# Altium PCB bootleg-ev.PcbDoc
Units mil, origin at the board's own origin, x right, y up, seen from the top; angles counter-clockwise.
Board outline 11212.63 x 3712.63 mil, 2 copper layers (Component Side, Bottom Layer), stack 61.855 mil thick; 169 components, 134 nets, 752 pads, 117 vias.
Unrouted connection lines stored in the file: 280.
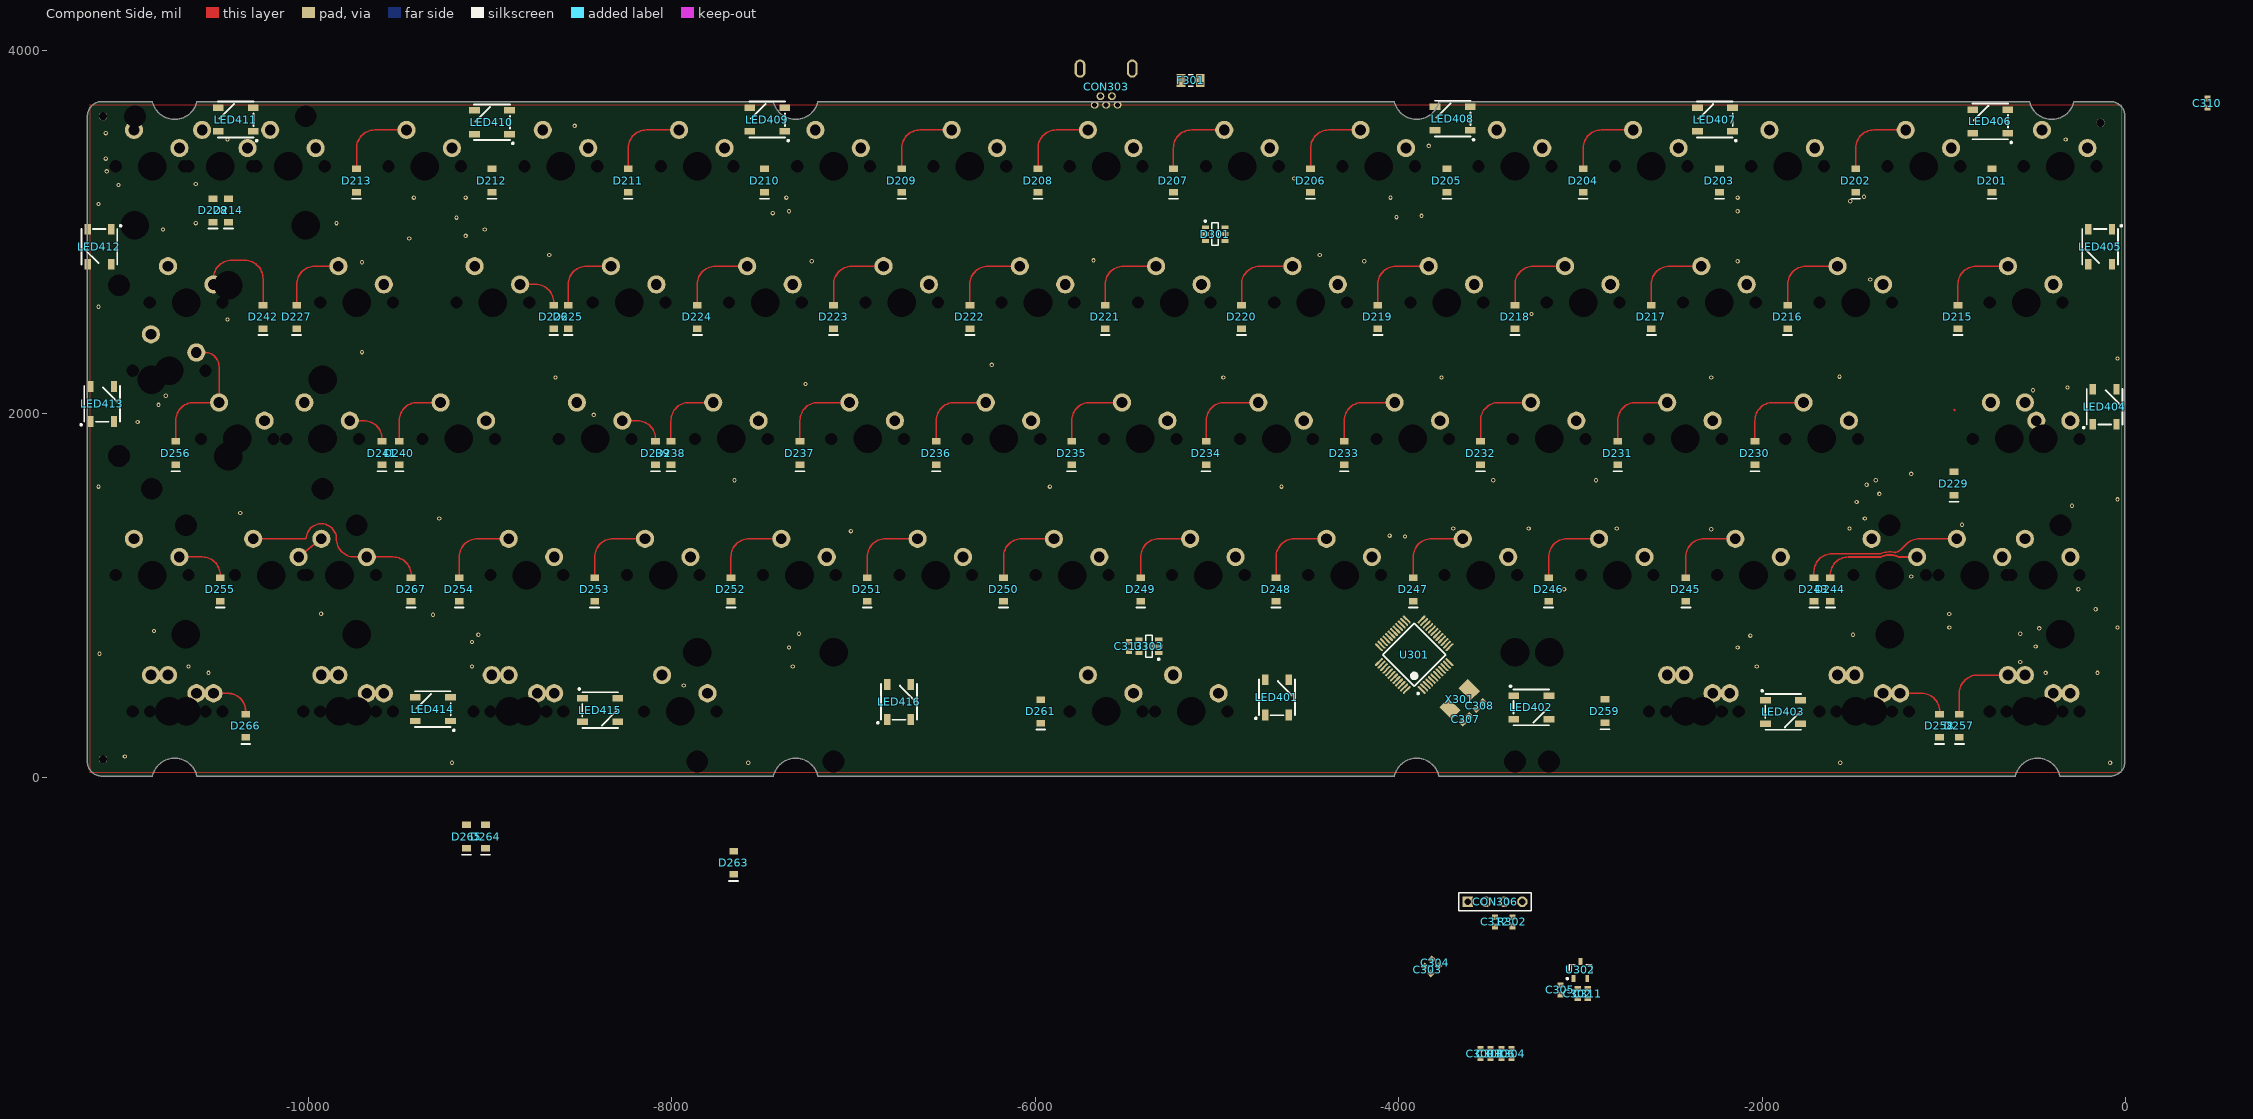
[diagram p0: Component Side view]
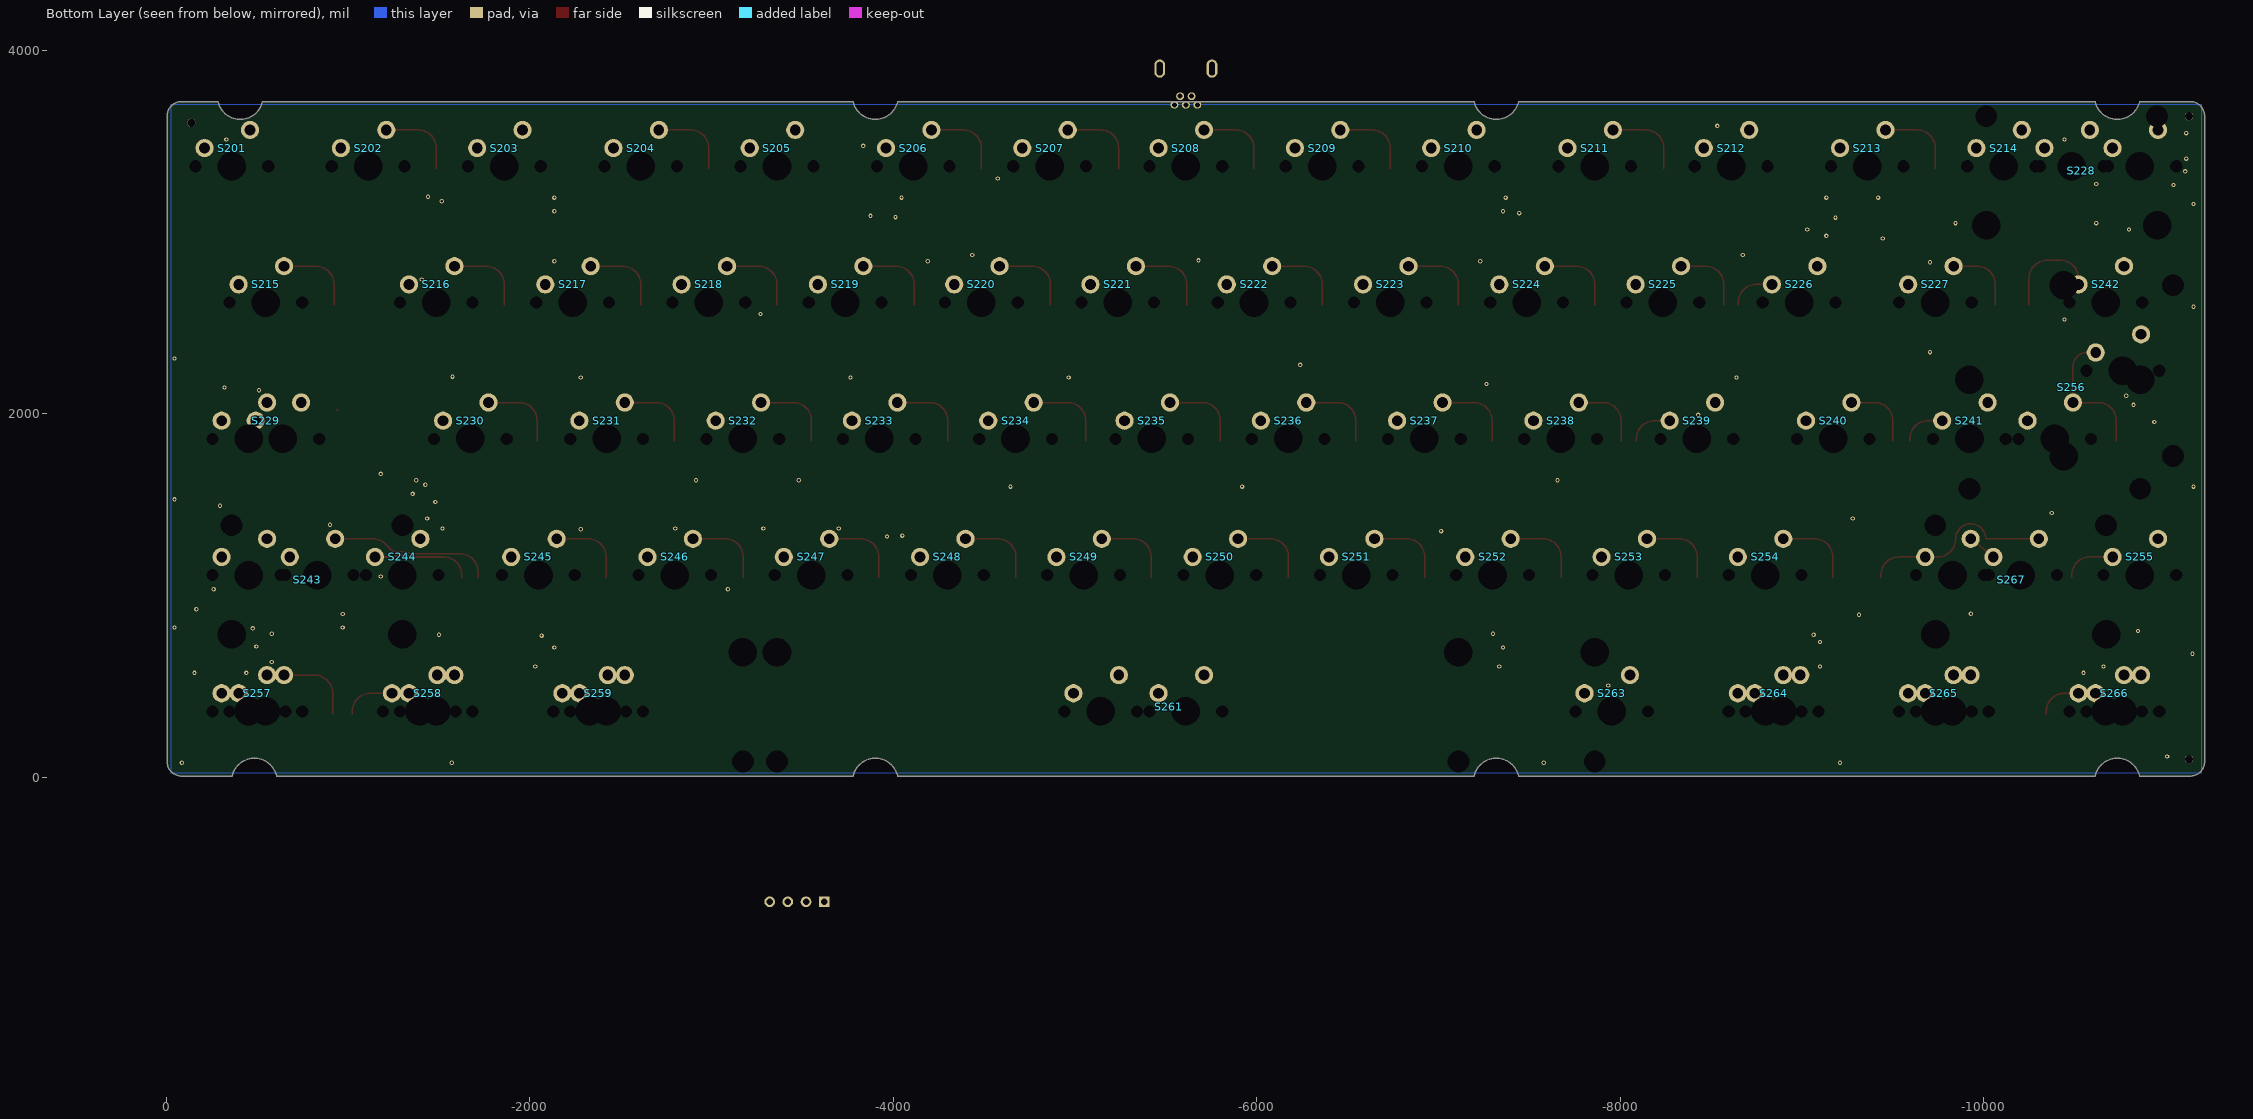
[diagram p1: Bottom Layer view, seen from below]

## Layer stack, top to bottom
Top Solder: solder mask 0.4, Solder Resist, Dk 3.5
Component Side: signal copper 1.4
Dielectric 1: core 59.0551, FR-4, Dk 4.2
Bottom Layer: signal copper 1.4
Solder Side: solder mask 0.4, Solder Resist, Dk 3.5

## Board outline
-11135.83,6.48 -10860.24,6.48 ccw(c-10860.24,8.46) -10858.3,8.03 cw(c-10736.22,-20.45) -10614.14,8.01 ccw(c-10612.21,8.46) -10612.21,6.48 -7442.91,6.48 ccw(c-7442.91,8.46) -7440.98,8.01 cw(c-7318.9,-20.45) -7196.82,8.03 cw(c-7318.9,-20.45) -7196.81,8.01 -7196.82,8.03 ccw(c-7194.88,8.46) -7194.88,6.48 -4025.59,6.48 ccw(c-4025.59,8.46) -4023.65,8.04 cw(c-3901.58,-20.45) -3779.5,8.03 ccw(c-3777.56,8.46) -3777.56,6.48 -608.27,6.48 ccw(c-608.27,8.46) -606.33,8.03 cw(c-484.25,-20.45) -362.17,8.01 ccw(c-360.24,8.46) -360.24,6.48 ccw(c-360.24,8.46) -360.24,6.48 -84.65,6.48 ccw(c-84.65,87.2) -3.92,87.2 -3.92,1537.95 ccw(c-5.91,1537.99) -3.92,1537.99 -3.92,3638.39 ccw(c-84.65,3638.39) -84.65,3719.11 -281.5,3719.11 ccw(c-281.5,3717.13) -282.03,3719.04 ccw(c-282.56,3717.13) -284.49,3717.58 cw(c-406.58,3746.04) -528.65,3717.56 ccw(c-530.59,3717.13) -530.59,3719.11 -3777.56,3719.11 cw(c-3777.56,3717.13) -3777.56,3719.11 ccw(c-3777.56,3717.13) -3779.49,3717.58 cw(c-3901.58,3746.04) -4023.65,3717.56 ccw(c-4025.59,3717.13) -4025.59,3719.11 -7194.88,3719.11 ccw(c-7194.88,3717.13) -7196.82,3717.56 ccw(c-7318.9,3746.04) -7196.81,3717.58 -7196.82,3717.56 cw(c-7318.9,3746.04) -7440.98,3717.58 ccw(c-7442.91,3717.13) -7442.91,3719.11 -10612.2,3719.11 ccw(c-10612.2,3717.12) -10614.13,3717.57 cw(c-10736.22,3746.04) -10858.31,3717.56 ccw(c-10860.25,3717.13) -10860.25,3719.11 -11135.83,3719.11 cw(c-11135.83,3717.13) -11135.81,3719.11 -11135.83,3719.11 ccw(c-11135.83,3638.39) -11216.55,3638.39 ccw(c-11214.57,3638.39) -11216.55,3638.37 -11216.55,1537.99 -11216.55,1605 cw(c-11214.57,1605) -11216.55,1605.03 -11216.55,1605 -11216.55,87.2 ccw(c-11135.83,87.2)

## Design rules (kind name [scope] priority, off if disabled: settings)
Clearance [All] p1: gap=7.87 ignorepadtopadclearanceinfootprint=FALSE except(0: Arc-Hole Track-Hole SMDPad-Hole THPad-Hole Via-Hole Fill-Hole Poly-Hole Region-Hole Text-Hole; 10: THPad-THPad THPad-Via THPad-Fill THPad-Poly THPad-Region THPad-Text Via-Via Via-Fill Via-Poly Via-Region Via-Text Fill-Fill Fill-Poly Fill-Region Fill-Text Poly-Poly Poly-Region Poly-Text Region-Region Region-Text Text-Text)
ComponentClearance [InComponent('No Component') And OnLayer('Component Side')] p1: gap=10 collisioncheckmode=3 verticalgap=10 showdistances=FALSE
DiffPairsRouting DiffPairsRouting_USB [InDifferentialPairClass('All Differential Pairs')] p1: maxlimit=10 minlimit=8 mostfreqgap=8 toplayer_minwidth=6 toplayer_maxwidth=15 toplayer_prefwidth=6 bottomlayer_minwidth=6 bottomlayer_maxwidth=15 bottomlayer_prefwidth=6 maxuncoupledlength=500
DiffPairsRouting [All] p2: maxlimit=10 minlimit=10 mostfreqgap=10 toplayer_minwidth=15 toplayer_maxwidth=15 toplayer_prefwidth=15 bottomlayer_minwidth=15 bottomlayer_maxwidth=15 bottomlayer_prefwidth=15 maxuncoupledlength=500
HoleSize [All] p1: absolutevalues=TRUE maxlimit=787.4 minlimit=1 maxpercent=80.000 minpercent=20.000
MatchedLengths MatchedLengths_USB_DiffPairs_1 [All] p1: tolerance=5 checknetsindiffpair=TRUE checkdiffpairvsdiffpair=FALSE checkxsignals=FALSE checkothers=FALSE
MatchedLengths MatchedLengths_USB_DiffPairs [All] p2: tolerance=5 checknetsindiffpair=TRUE checkdiffpairvsdiffpair=FALSE checkxsignals=FALSE checkothers=FALSE
PolygonConnect PolygonConnect_1 [All vs IsVia] p1: connectstyle=Direct reliefconductorwidth=10 reliefentries=4 polygonreliefangle="90 Angle" airgapwidth=10
PolygonConnect [All] p2: connectstyle=Relief reliefconductorwidth=10 reliefentries=4 polygonreliefangle="90 Angle" airgapwidth=10
RoutingVias [All] p1: holewidth=28 width=50 viastyle="Through Hole" minholewidth=11.81 minwidth=23.62 maxholewidth=28 maxwidth=50
SolderMaskExpansion [All] p1: expansion=4 istentingtop=FALSE
Width [All] p1: maxlimit=196.85 minlimit=8 preferedwidth=8 minimp=50.000000 maximp=50.000000 favimp=50.000000
27 further rules are at their usual default settings.

## Classes and differential pairs
component class Designator: C201 C202 C203 C204 C205 C206 D201 D202 D203 D204 D205 D206 D207 D208 D209 D210 D211 D212 D213 D214 D215 D216 D217 D218 D219 D220 D221 D222 D223 D224 D225 D226 D227 D228 D229 D230 D231 D232 D233 D234 D235 D236 D237 D238 D239 D240 D241 D242 D243 D244 D245 D246 D247 D248 D249 D250 D251 D252 D253 D254 D255 D256 D257 D258 D259 D261 D263 D264 D265 D266 D267 S201 S202 S203 S204 S205 S206 S207 S208 S209 S210 S211 S212 S213 S214 S215 S216 S217 S218 S219 S220 S221 S222 S223 S224 S225 S226 S227 S228 S229 S230 S231 S232 S233 S234 S235 S236 S237 S238 S239 S240 S241 S242 S243 S244 S245 S246 S247 S248 S249 S250 S251 S252 S253 S254 S255 S256 S257 S258 S259 S261 S263 S264 S265 S266 S267
differential pair D: +D_P -D_N

## Components (designator, comment, footprint, x,y, rotation, side; value= is the part's Value field where it differs from the comment)
C301 "" C0603[1608] -3495,-1520 r90 top value=0.1uF
C302 "" C0603[1608] -3015,-1190 r90 top value=0.1uF
C303 "" C0603[1608] -3840,-1060 r315 top value=0.1uF
C304 "" C0603[1608] -3800,-1020 r315 top value=0.1uF
C305 "" C0603[1608] -3110,-1170 r270 top value=0.1uF
C306 "" C0603[1608] -3435,-1520 r90 top value=0.1uF
C307 "" C0603[1608] -3630,320 r225 top value=30pF
C308 "" C0603[1608] -3555,395 r45 top value=30pF
C309 "" C0603[1608] -3550,-1520 r270 top value=0.1uF
C310 "" C0603[1608] 450,3710 r90 top value=4,7uF
C311 "" C0603[1608] -2960,-1190 r90 top value=1uF
C312 "" C0603[1608] -3470,-795 r270 top value=4,7uF
C313 "" C0603[1608] -5485,721.06 r270 top value=0.1uF
CON303 "TE 2172034-1" "TE 2172034-1" -5610.24,3900 r90 top
CON306 "Header 4" HDR1X4 -3320,-685 r180 top
D201 "Diode" SOD-123 -735,3284.06 r90 top
D202 "Diode" SOD-123 -1485,3284.06 r90 top
D203 "Diode" SOD-123 -2235,3284.06 r90 top
D204 "Diode" SOD-123 -2985,3284.06 r90 top
D205 "Diode" SOD-123 -3735,3284.06 r90 top
D206 "Diode" SOD-123 -4485,3284.06 r90 top
D207 "Diode" SOD-123 -5240,3284.06 r90 top
D208 "Diode" SOD-123 -5985,3284.06 r90 top
D209 "Diode" SOD-123 -6735,3284.06 r90 top
D210 "Diode" SOD-123 -7490,3284.06 r90 top
D211 "Diode" SOD-123 -8240,3284.06 r90 top
D212 "Diode" SOD-123 -8990,3284.06 r90 top
D213 "Diode" SOD-123 -9735,3284.06 r90 top
D214 "Diode" SOD-123 -10440,3120.08 r90 top
D215 "Diode" SOD-123 -922.5,2534.06 r90 top
D216 "Diode" SOD-123 -1860,2534.06 r90 top
D217 "Diode" SOD-123 -2610,2534.06 r90 top
D218 "Diode" SOD-123 -3360,2534.06 r90 top
D219 "Diode" SOD-123 -4115,2534.06 r90 top
D220 "Diode" SOD-123 -4865,2534.06 r90 top
D221 "Diode" SOD-123 -5615,2534.06 r90 top
D222 "Diode" SOD-123 -6360,2534.06 r90 top
D223 "Diode" SOD-123 -7110,2534.06 r90 top
D224 "Diode" SOD-123 -7860,2534.06 r90 top
D225 "Diode" SOD-123 -8570,2534.06 r90 top
D226 "Diode" SOD-123 -8650,2534.06 r90 top
D227 "Diode" SOD-123 -10065,2534.06 r90 top
D228 "Diode" SOD-123 -10525,3120.08 r90 top
D229 "Diode" SOD-123 -945,1616.42 r90 top
D230 "Diode" SOD-123 -2040,1784.06 r90 top
D231 "Diode" SOD-123 -2795,1784.06 r90 top
D232 "Diode" SOD-123 -3550,1784.06 r90 top
D233 "Diode" SOD-123 -4300,1784.06 r90 top
D234 "Diode" SOD-123 -5060,1784.06 r90 top
D235 "Diode" SOD-123 -5800,1784.06 r90 top
D236 "Diode" SOD-123 -6545,1784.06 r90 top
D237 "Diode" SOD-123 -7295,1784.06 r90 top
D238 "Diode" SOD-123 -8005,1784.06 r90 top
D239 "Diode" SOD-123 -8090,1784.06 r90 top
D240 "Diode" SOD-123 -9500,1784.06 r90 top
D241 "Diode" SOD-123 -9595,1784.06 r90 top
D242 "Diode" SOD-123 -10250,2534.06 r90 top
D243 "Diode" SOD-123 -1715,1034.06 r90 top
D244 "Diode" SOD-123 -1625,1034.06 r90 top
D245 "Diode" SOD-123 -2420,1034.06 r90 top
D246 "Diode" SOD-123 -3175,1034.06 r90 top
D247 "Diode" SOD-123 -3920,1034.06 r90 top
D248 "Diode" SOD-123 -4675,1034.06 r90 top
D249 "Diode" SOD-123 -5420,1034.06 r90 top
D250 "Diode" SOD-123 -6175,1034.06 r90 top
D251 "Diode" SOD-123 -6925,1034.06 r90 top
D252 "Diode" SOD-123 -7675,1034.06 r90 top
D253 "Diode" SOD-123 -8425,1034.06 r90 top
D254 "Diode" SOD-123 -9170,1034.06 r90 top
D255 "Diode" SOD-123 -10485,1034.06 r90 top
D256 "Diode" SOD-123 -10730,1784.06 r90 top
D257 "Diode" SOD-123 -915,284.06 r90 top
D258 "Diode" SOD-123 -1023.62,284.06 r90 top
D259 "Diode" SOD-123 -2865,364.37 r90 top
D261 "Diode" SOD-123 -5970,362.8 r90 top
D263 "Diode" SOD-123 -7660,-470 r90 top
D264 "Diode" SOD-123 -9025,-325.94 r90 top
D265 "Diode" SOD-123 -9130.08,-325.94 r90 top
D266 "Diode" SOD-123 -10345,284.06 r90 top
D267 "Diode" SOD-123 -9435,1034.06 r90 top
D301 "SRV05" SOT-23-6 -5010,2990 r0 top
F301 "Fuse Thermal" C1206[3216] -5145,3835 r180 top
LED401 "WS2812B" WS2812B -4670,440 r90 top
LED402 "WS2812B" WS2812B -3270,385 r0 top
LED403 "WS2812B" WS2812B -1885,360 r0 top
LED404 "WS2812B" WS2812B -115,2040 r90 top
LED405 "WS2812B" WS2812B -140,2920 r270 top
LED406 "WS2812B" WS2812B -745,3610 r180 top
LED407 "WS2812B" WS2812B -2260,3620 r180 top
LED408 "WS2812B" WS2812B -3703.54,3625.04 r180 top
LED409 "WS2812B" WS2812B -7475,3620 r180 top
LED410 "WS2812B" WS2812B -8990,3605 r180 top
LED411 "WS2812B" WS2812B -10400,3620 r180 top
LED412 "WS2812B" WS2812B -11150,2920 r270 top
LED413 "WS2812B" WS2812B -11135,2055 r90 top
LED414 "WS2812B" WS2812B -9315,375 r180 top
LED415 "WS2812B" WS2812B -8395,370 r0 top
LED416 "WS2812B" WS2812B -6750,415 r90 top
R302 "Res1" R0603[1608] -3375,-795 r270 top value=1.5K
R304 "Res1" R0603[1608] -3380,-1520 r90 top value=10K
S201 "MX" "MX-SWITCH - SWITCHED POL" -360.24,3362.8 r180 bottom locked
S202 "MX" "MX-switch - switched pol - connector" -1110.24,3362.8 r180 bottom locked
S203 "MX" "MX-SWITCH - SWITCHED POL" -1860.24,3362.8 r180 bottom locked
S204 "MX" "MX-switch - switched pol" -2610.24,3362.8 r180 bottom locked
S205 "MX" "MX-switch - switched pol" -3360.24,3362.8 r180 bottom locked
S206 "MX" "MX-switch - switched pol" -4110.24,3362.8 r180 bottom locked
S207 "MX" "MX-switch - switched pol" -4860.24,3362.8 r180 bottom locked
S208 "MX" "MX-switch - switched pol" -5610.24,3362.8 r180 bottom locked
S209 "MX" "MX-switch - switched pol" -6360.24,3362.8 r180 bottom locked
S210 "MX" "MX-switch - switched pol" -7110.24,3362.8 r180 bottom locked
S211 "MX" "MX-switch - switched pol" -7860.24,3362.8 r180 bottom locked
S212 "MX" "MX-switch - switched pol" -8610.24,3362.8 r180 bottom locked
S213 "MX" "MX-switch - switched pol" -9360.24,3362.8 r180 bottom locked
S214 "MX" "MX-switch - switched pol" -10110.24,3362.8 r180 bottom locked
S215 "MX" "MX-switch - 1.5U" -547.74,2612.8 r180 bottom locked
S216 "MX" "MX-SWITCH - SWITCHED POL" -1485.24,2612.8 r180 bottom locked
S217 "MX" "MX-SWITCH - SWITCHED POL" -2235.24,2612.8 r180 bottom locked
S218 "MX" "MX-SWITCH - SWITCHED POL" -2985.24,2612.8 r180 bottom locked
S219 "MX" "MX-SWITCH - SWITCHED POL" -3735.24,2612.8 r180 bottom locked
S220 "MX" "MX-SWITCH - SWITCHED POL" -4485.24,2612.8 r180 bottom locked
S221 "MX" "MX-SWITCH - SWITCHED POL" -5235.24,2612.8 r180 bottom locked
S222 "MX" "MX-SWITCH - SWITCHED POL" -5985.24,2612.8 r180 bottom locked
S223 "MX" "MX-SWITCH - SWITCHED POL" -6735.24,2612.8 r180 bottom locked
S224 "MX" "MX-SWITCH - SWITCHED POL" -7485.24,2612.8 r180 bottom locked
S225 "MX" "MX-SWITCH - SWITCHED POL" -8235.24,2612.8 r180 bottom locked
S226 "MX" MX-switch -8985.24,2612.8 r180 bottom locked
S227 "MX" "MX-SWITCH - SWITCHED POL" -9735.24,2612.8 r180 bottom locked
S228 "MX" "MX-switch - backspace" -10485,3362.8 r180 bottom locked
S229 "MX" "MX-switch - CAPS" -641.49,1862.8 r180 bottom locked
S230 "MX" "MX-SWITCH - SWITCHED POL" -1672.74,1862.8 r180 bottom locked
S231 "MX" "MX-SWITCH - SWITCHED POL" -2422.74,1862.8 r180 bottom locked
S232 "MX" "MX-SWITCH - SWITCHED POL" -3172.74,1862.8 r180 bottom locked
S233 "MX" "MX-SWITCH - SWITCHED POL" -3922.74,1862.8 r180 bottom locked
S234 "MX" "MX-SWITCH - SWITCHED POL" -4672.74,1862.8 r180 bottom locked
S235 "MX" "MX-SWITCH - SWITCHED POL" -5422.74,1862.8 r180 bottom locked
S236 "MX" "MX-SWITCH - SWITCHED POL" -6172.74,1862.8 r180 bottom locked
S237 "MX" "MX-SWITCH - SWITCHED POL" -6922.74,1862.8 r180 bottom locked
S238 "MX" "MX-SWITCH - SWITCHED POL" -7672.74,1862.8 r180 bottom locked
S239 "MX" MX-switch -8422.74,1862.8 r180 bottom locked
S240 "MX" "MX-SWITCH - SWITCHED POL" -9172.74,1862.8 r180 bottom locked
S241 "MX" MX-switch -9922.5,1862.8 r180 bottom locked
S242 "MX" "MX-switch - 1.5U" -10672.74,2612.8 r180 bottom locked
S243 "MX" "MX-SWITCH - LEFT SHIFT" -828.99,1112.8 r180 bottom locked
S244 "MX" MX-switch -1297.64,1112.8 r180 bottom locked
S245 "MX" "MX-SWITCH - SWITCHED POL" -2047.73,1112.8 r180 bottom locked
S246 "MX" "MX-SWITCH - SWITCHED POL" -2797.73,1112.8 r180 bottom locked
S247 "MX" "MX-SWITCH - SWITCHED POL" -3547.73,1112.8 r180 bottom locked
S248 "MX" "MX-SWITCH - SWITCHED POL" -4297.73,1112.8 r180 bottom locked
S249 "MX" "MX-SWITCH - SWITCHED POL" -5047.73,1112.8 r180 bottom locked
S250 "MX" "MX-SWITCH - SWITCHED POL" -5797.73,1112.8 r180 bottom locked
S251 "MX" "MX-SWITCH - SWITCHED POL" -6547.73,1112.8 r180 bottom locked
S252 "MX" "MX-SWITCH - SWITCHED POL" -7297.72,1112.8 r180 bottom locked
S253 "MX" "MX-SWITCH - SWITCHED POL" -8047.73,1112.8 r180 bottom locked
S254 "MX" "MX-SWITCH - SWITCHED POL" -8797.73,1112.8 r180 bottom locked
S255 "MX" MX-switch -10860.24,1112.8 r180 bottom locked
S256 "MX" "MX-SWITCH - ENTER" -10391.73,1862.8 r180 bottom locked
S257 "MX" "MX-switch - 1.5u MOD-L" -547.74,362.8 r180 bottom locked
S258 "MX" "MX-switch - 1u MOD-L" -1485,362.8 r180 bottom locked
S259 "MX" "MX-switch - 1.5u MOD-L" -2422.72,362.8 r180 bottom locked
S261 "MX" "MX-switch - Space_V2" -5610.22,362.8 r180 bottom locked
S263 "MX" MX-switch -7953.98,362.8 r180 bottom locked
S264 "MX" "MX-switch - 1.5u MOD-R" -8797.72,362.8 r180 bottom locked
S265 "MX" "MX-switch - 1u MOD-R" -9735,362.8 r180 bottom locked
S266 "MX" "MX-switch - 1.5u MOD-R" -10672.72,362.8 r180 bottom locked
S267 "MX" "MX-SWITCH - RIGHT SHIFT" -10203.94,1112.8 r180 bottom locked
U301 "STM32F072/F303_LQFP48" "STM32 - LQFP48, 7x7mm" -3915,675 r135 top
U302 "SOT23 LDO" SOT-23-3 -3000,-1060 r90 top
U303 "SN74LV1T125" SOT-23-5 -5375,721.06 r180 top
X301 "XTAL" "CTS 445-series crystal" -3665,430 r45 top value=8MHz

## Footprints (in the part's own frame and the unit in brackets; to place one, negate y for a bottom-side part, rotate by r counter-clockwise, add the part's x,y. Pads: shape width x height; smd on the part's side, far side on the other; paste and mask are expansions set on the pad)
C0603[1608] [mm] "Chip Resistor, 2-Leads, Body 1,57x0,80mm, IPC Medium Density"
  rect 0.8x0.85 smd: 1(-0.65,0) 2(0.65,0)
  body extent -0.83,-0.43 0.82,0.43, height 0.5
C1206[3216] [mm]
  rect 1.2x1.8 smd: 1(-1.35,0) 2(1.35,0)
  silkscreen extent -0.35,-0.8 0.35,0.8, body extent -1.6,-0.9 1.6,0.9, height 1.2
"CTS 445-series crystal" [mm]
  rect 1.8x2.4 smd: 1(-1.9,0) 2(1.9,0)
  body extent -2.5,-1.6 2.5,1.6, height 1.3
HDR1X4 [mm] "Connector; Header; 4 Position"
  round 1.5 hole 0.9 mask+0.102: 1(0,0) 2(2.54,0) 3(5.08,0)
  rect 1.5x1.5 hole 0.9 mask+0.102: 4(7.62,0)
  silkscreen extent -1.27,-1.27 8.89,1.27
MX-switch [mm]
  round 2.54 hole 1.499 mask+0.102: 1(-3.81,2.54) 2(2.54,5.08)
  round 1 hole 1.702 unplated: ""(-5.08,0) ""(5.08,0)
  round 1 hole 3.988 unplated: ""(0,0)
"MX-switch - 1.5U" [mm]
  round 2.54 hole 1.499 mask+0.102: 1(-3.81,2.54) 2(2.54,5.08)
  round 1 hole 1.702 unplated: ""(-5.08,0) ""(5.08,0)
  round 1 hole 3.988 unplated: ""(0,0)
  round 1 on Mech14: ""(0,0)
"MX-switch - 1.5u MOD-L" [mm]
  round 2.54 hole 1.499 mask+0.102: 1(-6.191,2.54) 1(-3.81,2.54) 2(0.159,5.08) 2(2.54,5.08)
  round 1 hole 1.702 unplated: ""(-7.461,0) ""(-5.08,0) ""(2.699,0) ""(5.08,0)
  round 1 on Mech14: ""(-4.763,0) ""(-2.381,0) ""(0,0) ""(4.763,0)
  round 1 hole 3.988 unplated: ""(-2.381,0) ""(0,0)
"MX-switch - 1.5u MOD-R" [mm]
  round 2.54 hole 1.499 mask+0.102: 1(-3.81,2.54) 1(-1.429,2.54) 2(2.54,5.08) 2(4.921,5.08)
  round 1 hole 1.702 unplated: ""(-5.08,0) ""(-2.699,0) ""(5.08,0) ""(7.461,0)
  round 1 on Mech14: ""(-2.381,0) ""(0,0) ""(2.381,0) ""(4.763,0)
  round 1 hole 3.988 unplated: ""(0,0) ""(2.381,0)
"MX-switch - 1u MOD-L" [mm]
  round 2.54 hole 1.499 mask+0.102: 1(-6.191,2.54) 1(-3.81,2.54) 2(0.159,5.08) 2(2.54,5.08)
  round 1 hole 1.702 unplated: ""(-7.461,0) ""(-5.08,0) ""(2.699,0) ""(5.08,0)
  round 1 hole 3.988 unplated: ""(-2.381,0) ""(0,0)
  round 1 on Mech14: ""(-2.381,0) ""(0,0) ""(2.381,0)
"MX-switch - 1u MOD-R" [mm]
  round 2.54 hole 1.499 mask+0.102: 1(-3.81,2.54) 1(-1.429,2.54) 2(2.54,5.08) 2(4.921,5.08)
  round 1 hole 1.702 unplated: ""(-5.08,0) ""(-2.699,0) ""(5.08,0) ""(7.461,0)
  round 1 on Mech14: ""(-4.763,0) ""(-2.381,0) ""(0,0) ""(2.381,0)
  round 1 hole 3.988 unplated: ""(0,0) ""(2.381,0)
"MX-switch - backspace" [mil]
  round 100 hole 59 mask+4: 1(100,200) 1(225,100) 2(-150,100) 2(475,200)
  round 60 hole 157.01 unplated: ""(-470,-325) ""(470,-325)
  round 60 hole 120 unplated: ""(-470,275) ""(470,275)
  round 39.37 hole 67.01 unplated: ""(-200,0) ""(175,0) ""(200,0) ""(575,0)
  round 39.37 hole 157.01 unplated: ""(0,0) ""(375,0)
  round 39.37 on Mech14: ""(0,0) ""(375,0)
"MX-switch - CAPS" [mm]
  round 2.54 hole 1.499 mask+0.102: 1(-8.572,2.54) 1(2.54,5.08) 2(-3.81,2.54) 2(-2.222,5.08)
  round 1 hole 1.702 unplated: ""(-9.842,0) ""(5.08,0)
  round 1 hole 3.988 unplated: ""(-4.763,0) ""(0,0)
  round 1 on Mech14: ""(-4.763,0) ""(0,0)
"MX-SWITCH - ENTER" [mm]
  round 2.54 hole 1.499 mask+0.102: 1(2.54,5.08) 1(5.72,12.07) 2(-3.81,2.54) 2(12.07,14.61)
  round 1.524 hole 3.048 unplated: ""(-11.938,-6.985) ""(11.938,-6.985) ""(16.515,-2.408) ""(16.515,21.468)
  round 1.524 hole 3.988 unplated: ""(-11.938,8.255) ""(1.275,-2.408) ""(1.275,21.468) ""(11.938,8.255)
  round 1 hole 1.702 unplated: ""(-5.08,0) ""(4.45,9.53) ""(5.08,0) ""(14.61,9.53)
  round 1 hole 3.988 unplated: ""(0,0) ""(9.53,9.53)
  round 1 on Mech14: ""(0,0) ""(9.53,9.53)
"MX-SWITCH - LEFT SHIFT" [mil]
  round 100 hole 59 mask+4: 1(-525,100) 1(100,200) 2(-275,200) 2(-150,100)
  round 39.37 hole 67.01 unplated: ""(-575,0) ""(-200,0) ""(-175,0) ""(200,0)
  round 60 hole 157.01 unplated: ""(-470,-325) ""(470,-325)
  round 60 hole 120 unplated: ""(-470,275) ""(470,275)
  round 39.37 hole 157.01 unplated: ""(-375,0) ""(0,0)
  round 39.37 on Mech14: ""(-375,0) ""(0,0)
"MX-SWITCH - RIGHT SHIFT" [mil]
  round 100 hole 59 mask+4: 1(-525,100) 1(100,200) 2(-275,200) 2(-150,100)
  round 39.37 hole 67.01 unplated: ""(-575,0) ""(-200,0) ""(-175,0) ""(200,0)
  round 60 hole 157.01 unplated: ""(-470,-325) ""(470,-325)
  round 60 hole 120 unplated: ""(-470,275) ""(470,275)
  round 39.37 hole 157.01 unplated: ""(-375,0) ""(0,0)
  round 39.37 on Mech14: ""(-375,0) ""(0,0)
"MX-switch - Space_V2" [mil]
  round 100 hole 59 mask+4: 1(-368.75,200) 1(-150,100) 2(-618.75,100) 2(100,200)
  round 60 hole 120 unplated: ""(-2437.4,-275) ""(-2250,-275) ""(1499.61,-275) ""(2250,-275)
  round 60 hole 157.01 unplated: ""(-2437.4,325) ""(-2250,325) ""(1499.61,325) ""(2250,325)
  round 39.37 hole 67.01 unplated: ""(-668.75,0) ""(-268.75,0) ""(-200,0) ""(200,0)
  round 39.37 hole 157.01 unplated: ""(-468.75,0) ""(0,0)
  round 39.37 on Mech14: ""(-468.75,0) ""(0,0)
"MX-SWITCH - SWITCHED POL" [mm]
  round 2.54 hole 1.499 mask+0.102: 1(2.54,5.08) 2(-3.81,2.54)
  round 1 hole 1.702 unplated: ""(-5.08,0) ""(5.08,0)
  round 1 hole 3.988 unplated: ""(0,0)
"MX-switch - switched pol" [mm]
  round 2.54 hole 1.499 mask+0.102: 1(2.54,5.08) 2(-3.81,2.54)
  round 1 hole 1.702 unplated: ""(-5.08,0) ""(5.08,0)
  round 1 hole 3.988 unplated: ""(0,0)
"MX-switch - switched pol - connector" [mm]
  round 2.54 hole 1.499 mask+0.102: 1(2.54,5.08) 2(-3.81,2.54)
  round 1 hole 1.702 unplated: ""(-5.08,0) ""(5.08,0)
  round 1 hole 3.988 unplated: ""(0,0)
R0603[1608] [mm] "Chip Resistor, 2-Leads, Body 1,57x0,80mm, IPC Medium Density"
  rect 0.8x0.85 smd: 1(-0.65,0) 2(0.65,0)
  body extent -0.83,-0.43 0.82,0.43, height 0.5
SOD-123 [mm]
  rect 0.91x1.22 smd: 1(1.635,0) 2(-1.635,0)
  silkscreen extent -2.54,-0.64 -2.54,0.63, body extent -1.87,-0.85 1.88,0.85, height 1.2
SOT-23-3 [mm] "3.3v regulator, used in Windsond S2 proto 1"
  rect 1x0.55 smd: 1(-1.2,0.95) 2(-1.2,-0.95) 3(1.2,0)
  silkscreen extent -1.32,-1.55 0.7,1.95, body extent -1.45,-1.5 1.1,1.5, height 1
SOT-23-5 [mm]
  rect 1x0.55 smd: 1(-1.375,0.95) 2(-1.375,0) 3(-1.375,-0.95) 4(1.375,-0.95) 5(1.375,0.95)
  silkscreen extent -1.5,-1.55 0.46,1.92, body extent -1.63,-1.5 1.58,1.5, height 0.92
SOT-23-6 [mm]
  rect 1x0.55 smd: 1(-1.375,0.95) 2(-1.375,0) 3(-1.375,-0.95) 4(1.375,-0.95) 5(1.375,0) 6(1.375,0.95)
  silkscreen extent -1.5,-1.55 0.46,1.92, body extent -1.37,-1.44 1.47,1.49, height 1.05
"STM32 - LQFP48, 7x7mm" [mm] "LQFP48, 7x7mm"
  oval 1.45x0.3 smd: 1(-4.225,2.75) 2(-4.225,2.25) 3(-4.225,1.75) 4(-4.225,1.25) 5(-4.225,0.75) 6(-4.225,0.25) 7(-4.225,-0.25) 8(-4.225,-0.75) 9(-4.225,-1.25) 10(-4.225,-1.75) 11(-4.225,-2.25) 12(-4.225,-2.75) 25(4.225,-2.75) 26(4.225,-2.25) 27(4.225,-1.75) 28(4.225,-1.25) 29(4.225,-0.75) 30(4.225,-0.25) 31(4.225,0.25) 32(4.225,0.75) 33(4.225,1.25) 34(4.225,1.75) 35(4.225,2.25) 36(4.225,2.75)
  oval 0.3x1.45 smd: 13(-2.75,-4.225) 14(-2.25,-4.225) 15(-1.75,-4.225) 16(-1.25,-4.225) 17(-0.75,-4.225) 18(-0.25,-4.225) 19(0.25,-4.225) 20(0.75,-4.225) 21(1.25,-4.225) 22(1.75,-4.225) 23(2.25,-4.225) 24(2.75,-4.225) 37(2.75,4.225) 38(2.25,4.225) 39(1.75,4.225) 40(1.25,4.225) 41(0.75,4.225) 42(0.25,4.225) 43(-0.25,4.225) 44(-0.75,4.225) 45(-1.25,4.225) 46(-1.75,4.225) 47(-2.25,4.225) 48(-2.75,4.225)
  silkscreen extent -4.35,-3.1 3.1,3.57, body extent -4.5,-4.5 4.5,4.5, height 1.6
"TE 2172034-1" [mm] "USB Mini THT"
  round 1.1 hole 0.7: 1(-5.05,-1.6) 2(-3.85,-0.8) 3(-5.05,0) 4(-3.85,0.8) 5(-5.05,1.6)
  oval 2.54x1.524 hole 0.8 slot 1.9 at 0 deg: S(0,3.65) S(0,-3.65)
  body extent -5.82,-4.38 3.78,4.32, height 4.14
WS2812B [mm]
  rect 1.5x0.9 smd: 1(-2.45,1.65) 2(-2.45,-1.65) 3(2.45,-1.65) 4(2.45,1.65)
  silkscreen extent -3.05,-2.5 2.5,3.07, body extent -2.65,-2.45 2.7,2.5, height 1.5

## Part data
C301 C302 C303 C304 C305 C306 C309 C313: library part Cap, "Capacitor", LCSC MFG=YAGEO, LCSC Part #=C14663, MFG=KEMET, MFGPN=C0603C104M5RACTU, MRF.Part=CC0603KRX7R9BB104, Version="0603 imperial"
C307 C308: library part Cap, "Capacitor", LCSC MFG="Samsung Electro-Mechanics", LCSC Part #=C22397, MRF.Part=CL10C300JB8NNNC, Version="0603 imperial"
C310 C312: library part Cap, "Capacitor", LCSC MFG="Samsung Electro-Mechanics", LCSC Part #=C19666
C311: library part Cap, "Capacitor", LCSC MFG="Samsung Electro-Mechanics", LCSC Part #=C15849, MFG=KEMET, MFGPN=C0603C104M5RACTU, MRF.Part=CL10A105KB8NNNC, Version="0603 imperial"
CON306: "Header, 4-Pin"
D201 D202 D203 D204 D205 D206 D207 D208 D209 D210 D211 D212 D213 D214 D215 D216 D217 D218 D219 D220 D221 D222 D223 D224 D225 D226 D227 D228 D229 D230 D231 D232 D233 D234 D235 D236 D237 D238 D239 D240 D241 D242 D243 D244 D245 D246 D247 D248 D249 D250 D251 D252 D253 D254 D255 D256 D257 D258 D259 D261 D263 D264 D265 D266 D267: "Default Diode", LCSC MFG=ST(Semtech), LCSC Part #=C81598, MRF.Part=1N4148W, Version=SOD-123
D301: LCSC MFG="ProTek Devices", LCSC Part #=C85364, MRF.Part=SRV05-4-P-T7
F301: "Thermal Fuse", LCSC MFG="Shenzhen JDT Fuse", LCSC Part #=C135338, MFG="Bel Fuse Inc.", MFGPN=0ZCJ0050FF2G, MRF.Part=ASMD1206-050
LED401 LED402 LED403 LED404 LED405 LED406 LED407 LED408 LED409 LED410 LED411 LED412 LED413 LED414 LED415 LED416: LCSC MFG=Worldsemi, LCSC Part #=C965555, MRF.Part=WS2812B-2020
R302: "Resistor", LCSC MFG="Uniroyal Elec", LCSC Part #=C22843, MRF.Part=0603WAF1501T5E, Version="0603 imperial"
R304: "Resistor", LCSC MFG="Uniroyal Elec", LCSC Part #=C25804, MFG="Panasonic Electronic Components", MFGPN=ERJ-3EKF5101V, MRF.Part=0603WAF1002T5E, Version="0603 imperial"
S201 S202 S203 S204 S205 S206 S207 S208 S209 S210 S211 S212 S213 S214 S216 S217 S218 S219 S220 S221 S222 S223 S224 S225 S226 S227 S228 S229 S230 S231 S232 S233 S234 S235 S236 S237 S238 S239 S240 S241 S242 S243 S244 S245 S246 S247 S248 S249 S250 S251 S252 S253 S254 S255 S256 S257 S258 S259 S261 S263 S264 S265 S266 S267: library part SW-PB, "Switch"
S215: library part SW-PB, "TAB"
U302: LCSC MFG="Torex Semicon", LCSC Part #=C5446, MFG="Texas Instruments", MFGPN=TPS7A0533PDBZ, MRF.Part=XC6206P332MR
U303: "SN74LV1T125 or SN74LV1T34. Connect OE to GND", LCSC MFG="Texas Instruments", LCSC Part #=C473338, MRF.Part=SN74LV1T125DBVR, Version=SOT-23
X301: "Crystal Oscillator", LCSC MFG="Yangxing Tech", LCSC Part #=C115962, MRF.Part=X50328MSB2GI, Version=SMD-5032_2P
U301: MFG=STMicroelectronics, MFGPN=STM32F072CBT6TR

## Free pads (board coordinates)
  round 45.35 hole 45.35 unplated paste+5.83 mask+5.83: ""(-11130.22,3637.8) ""(-11130.22,100) ""(-137.74,3602.8)

## Via types
v1: diameter 23.62, hole 11.81, Component Side to Bottom Layer, tented both sides, 117 vias

## Nets (pads, with @x,y where several pads share a name; then routed paths per layer and width w, separated by ;. In a path a pad name is that pad's centre, name@x,y a point inside that pad or via, vN(x,y) a via of type N, cw(c..) or ccw(c..) an arc to the next point about the centre after c; other vN are vias at no path point)
BOOT0: R304.2 U301.44
D_N: CON303.4 D301.4 U301.32
D_P: CON303.3 D301.3 R302.2 U301.33
GND: C301.1 C302.1 C303.1 C304.1 C305.1 C306.1 C307.1 C308.1 C309.2 C310.1 C311.1 C312.1 C313.1 CON303.1 CON303.S CON306.4 D301.2 LED401.3 LED402.3 LED403.3 LED404.3 LED405.3 LED406.3 LED407.3 LED408.3 LED409.3 LED410.3 LED411.3 LED412.3 LED413.3 LED414.3 LED415.3 LED416.3 R304.1 U301.8 U301.23 U301.35 U301.47 U302.1 U303.1 U303.3
  other v1: -9210,80 -7580,80 -1570,80 -85,80 -11010,115 -7935,505 -10550,575 -9830,575 -440,575 -155,575 -10660,610 -9100,610 -7335,610 -2030,610 -580,635 -11150,680 -7355,715 -2135,715 -495,720 -9100,745 -2065,780 -9065,785 -1500,785 -7300,790 -580,790 -10850,805 -475,820 -970,825 -45,825 -9315,895 -165,925 -3090,1035 -260,1035 -1180,1105 -3965,1325 -4050,1330 -7015,1355 -2280,1365 -3700,1370 -3285,1370 -2800,1370 -1520,1370 -900,1390 -9280,1425 -1435,1425 -10375,1455 -295,1495 -1480,1515 -45,1530 -1355,1560 -11155,1600 -5920,1600 -4645,1600 -1425,1610 -7655,1635 -3480,1635 -2915,1635 -1375,1635 -1180,1670 -10940,1955 -8430,1995 -10825,2050 -10785,2100 -510,2130 -320,2145 -7265,2165 -8640,2200 -4965,2200 -3765,2200 -2280,2200 -1575,2205 -6240,2270 -45,2305 -9705,2340 -10445,2520 -3270,2550 -11155,2590 -1405,2740 -9705,2835 -7230,2840 -4190,2840 -2135,2840 -5680,2845 -8675,2875 -4435,2875 -9445,2965 -9135,2980 -10800,3015 -9030,3015 -10620,3050 -9845,3050 -9185,3080 -4012.12,3082.76 -3875,3090 -7445,3105 -7355,3115 -2135,3115 -11155,3155 -1515,3170 -9420,3190 -9135,3190 -7370,3190 -4045,3190 -2135,3190 -1440,3195 -11045,3260 -10620,3265 -4575,3295 -11110,3335 -11115,3405 -3835,3475 -10445,3510 -330,3510 -11115,3545 -8535,3585
NetC307_2: C307.2 U301.5 X301.1
NetC308_2: C308.2 U301.6 X301.2 | length 11.8
  Component Side w8: -945.46,2026.25 -937.11,2017.89
NetD201_1: D201.1 S201.1
NetD201_2: D201.2 D203.2 D205.2 D207.2 D209.2 D211.2 D213.2 U301.17
NetD202_1: D202.1 S202.1 | length 446.2
  Component Side w8: D202.1 -1485,3462.8 cw(c-1385,3462.8) -1385,3562.8 S202.1
NetD202_2: D202.2 D204.2 D206.2 D208.2 D210.2 D212.2 D214.2 U301.25
NetD203_1: D203.1 S203.1
NetD204_1: D204.1 S204.1 | length 446.2
  Component Side w8: D204.1 -2985,3462.8 cw(c-2885,3462.8) -2885,3562.8 S204.1
NetD205_1: D205.1 S205.1
NetD206_1: D206.1 S206.1 | length 446.2
  Component Side w8: D206.1 -4485,3462.8 cw(c-4385,3462.8) -4385,3562.8 S206.1
NetD207_1: D207.1 S207.1 | length 451.2
  Component Side w8: D207.1 -5240,3462.8 cw(c-5140,3462.8) -5140,3562.8 S207.1
NetD208_1: D208.1 S208.1 | length 446.2
  Component Side w8: D208.1 -5985,3462.8 cw(c-5885,3462.8) -5885,3562.8 S208.1
NetD209_1: D209.1 S209.1 | length 446.2
  Component Side w8: D209.1 -6735,3462.8 cw(c-6635,3462.8) -6635,3562.8 S209.1
NetD210_1: D210.1 S210.1
NetD211_1: D211.1 S211.1 | length 451.2
  Component Side w8: D211.1 -8240,3462.8 cw(c-8140,3462.8) -8140,3562.8 S211.1
NetD212_1: D212.1 S212.1
NetD213_1: D213.1 S213.1 | length 446.2
  Component Side w8: D213.1 -9735,3462.8 cw(c-9635,3462.8) -9635,3562.8 S213.1
NetD214_1: D214.1 S214.1
NetD215_1: D215.1 S215.2 | length 446.2
  Component Side w8: D215.1 -922.5,2712.8 cw(c-822.5,2712.8) -822.5,2812.8 S215.2
NetD215_2: D215.2 D217.2 D219.2 D221.2 D223.2 D225.2 D227.2 U301.26
  other v1: -970.87,899.13
NetD216_1: D216.1 S216.1 | length 446.2
  Component Side w8: D216.1 -1860,2712.8 cw(c-1760,2712.8) -1760,2812.8 S216.1
NetD216_2: D216.2 D218.2 D220.2 D222.2 D224.2 D226.2 D228.2
NetD217_1: D217.1 S217.1 | length 446.2
  Component Side w8: D217.1 -2610,2712.8 cw(c-2510,2712.8) -2510,2812.8 S217.1
NetD218_1: D218.1 S218.1 | length 446.2
  Component Side w8: D218.1 -3360,2712.8 cw(c-3260,2712.8) -3260,2812.8 S218.1
NetD219_1: D219.1 S219.1 | length 451.2
  Component Side w8: D219.1 -4115,2712.8 cw(c-4015,2712.8) -4015,2812.8 S219.1
NetD220_1: D220.1 S220.1 | length 479.2
  Component Side w8: D220.1 -4865,2712.8 cw(c-4765,2712.8) -4765,2812.8 S220.1 S220.1@-4605,2793.03
NetD221_1: D221.1 S221.1 | length 451.2
  Component Side w8: D221.1 -5615,2712.8 cw(c-5515,2712.8) -5515,2812.8 S221.1
NetD222_1: D222.1 S222.1 | length 446.2
  Component Side w8: D222.1 -6360,2712.8 cw(c-6260,2712.8) -6260,2812.8 S222.1
NetD223_1: D223.1 S223.1 | length 446.2
  Component Side w8: D223.1 -7110,2712.8 cw(c-7010,2712.8) -7010,2812.8 S223.1
NetD224_1: D224.1 S224.1 | length 446.2
  Component Side w8: D224.1 -7860,2712.8 cw(c-7760,2712.8) -7760,2812.8 S224.1
NetD225_1: D225.1 S225.1 | length 406.2
  Component Side w8: D225.1 -8570,2712.8 cw(c-8470,2712.8) -8470,2812.8 S225.1
NetD226_1: D226.1 S226.1 | length 256.7
  Component Side w8: S226.1 -8750,2712.8 cw(c-8750,2612.8) -8650,2612.8 D226.1
NetD227_1: D227.1 S227.1 | length 401.2
  Component Side w8: D227.1 -10065,2712.8 cw(c-9965,2712.8) -9965,2812.8 S227.1
NetD228_1: D228.1 S228.2
NetD229_1: D229.1 S229.1
NetD229_2: D229.2 D231.2 D233.2 D235.2 D237.2 D239.2 D241.2 U301.18
NetD230_1: D230.1 S230.1 | length 438.7
  Component Side w8: D230.1 -2040,1962.8 cw(c-1940,1962.8) -1940,2062.8 S230.1
NetD230_2: D230.2 D232.2 D234.2 D236.2 D238.2 D240.2 D242.2
NetD231_1: D231.1 S231.1 | length 443.7
  Component Side w8: D231.1 -2795,1962.8 cw(c-2695,1962.8) -2695,2062.8 S231.1
NetD232_1: D232.1 S232.1 | length 448.7
  Component Side w8: D232.1 -3550,1962.8 cw(c-3450,1962.8) -3450,2062.8 S232.1
NetD233_1: D233.1 S233.1 | length 448.7
  Component Side w8: D233.1 -4300,1962.8 cw(c-4200,1962.8) -4200,2062.8 S233.1
NetD234_1: D234.1 S234.1 | length 490.2
  Component Side w8: D234.1 -5060,1962.8 cw(c-4960,1962.8) -4960,2062.8 S234.1
  Bottom Layer w10: S234.1@-4795,2040.53 S234.1
NetD235_1: D235.1 S235.1 | length 448.7
  Component Side w8: D235.1 -5800,1962.8 cw(c-5700,1962.8) -5700,2062.8 S235.1
NetD236_1: D236.1 S236.1 | length 443.7
  Component Side w8: D236.1 -6545,1962.8 cw(c-6445,1962.8) -6445,2062.8 S236.1
NetD237_1: D237.1 S237.1 | length 443.7
  Component Side w8: D237.1 -7295,1962.8 cw(c-7195,1962.8) -7195,2062.8 S237.1
NetD238_1: D238.1 S238.1 | length 403.7
  Component Side w8: D238.1 -8005,1962.8 cw(c-7905,1962.8) -7905,2062.8 S238.1
NetD239_1: D239.1 S239.1 | length 254.2
  Component Side w8: S239.1 -8190,1962.8 cw(c-8190,1862.8) -8090,1862.8 D239.1
NetD240_1: D240.1 S240.1 | length 398.7
  Component Side w8: D240.1 -9500,1962.8 cw(c-9400,1962.8) -9400,2062.8 S240.1
NetD241_1: D241.1 S241.1 | length 248.2
  Component Side w8: S241.1@-9771.73,1962.8 -9695,1962.8 cw(c-9695,1862.8) -9595,1862.8 D241.1
NetD242_1: D242.1 S242.1 | length 591.1
  Component Side w8: S242.1 -10522.74,2745 cw(c-10422.74,2745) -10422.74,2845 -10385,2845 -10350,2845 cw(c-10350,2745) -10250,2745 D242.1
  Bottom Layer w10: S242.1@-10540.71,2694.82 S242.1
NetD243_1: D243.1 S243.1 | length 901.5
  Component Side w8: D243.1 -1715,1130.67 cw(c-1615,1130.67) -1615,1230.67 -1349.46,1230.67 ccw(c-1349.46,1238.67) -1346.42,1231.27 cw(c-1297.64,1112.8) -1268.29,1237.51 ccw(c-1266.45,1245.3) -1263.52,1237.86 ccw(c-1300.75,1330.67) -1230.04,1259.96 -1206.49,1283.51 cw(c-1135.78,1212.8) -1135.78,1312.8 S243.1@-928.99,1312.8
NetD243_2: D243.2 D245.2 D247.2 D249.2 D251.2 D253.2 D267.2
NetD244_1: D244.1 S244.1 | length 552.1
  Component Side w8: D244.1 -1625,1112.8 cw(c-1525,1112.8) -1525,1212.8
  Component Side w10: -1525,1212.8 -1348.65,1212.8 ccw(c-1348.65,1222.8) -1344.44,1213.72 cw(c-1297.64,1112.8) -1250.83,1213.72 ccw(c-1246.63,1222.8) -1246.63,1212.8 S244.1
NetD244_2: D244.2 D246.2 D248.2 D250.2 D252.2 D254.2 D256.2
NetD245_1: D245.1 S245.1 | length 443.7
  Component Side w8: D245.1 -2420,1212.8 cw(c-2320,1212.8) -2320,1312.8 S245.1
NetD246_1: D246.1 S246.1 | length 487.3
  Component Side w8: D246.1 -3175,1212.8 cw(c-3075,1212.8) -3075,1312.8 S246.1 S246.1@-2925,1285.52
NetD247_1: D247.1 S247.1 | length 443.7
  Component Side w8: D247.1 -3920,1212.8 cw(c-3820,1212.8) -3820,1312.8 S247.1
NetD248_1: D248.1 S248.1 | length 448.7
  Component Side w8: D248.1 -4675,1212.8 cw(c-4575,1212.8) -4575,1312.8 S248.1
NetD249_1: D249.1 S249.1 | length 443.7
  Component Side w8: D249.1 -5420,1212.8 cw(c-5320,1212.8) -5320,1312.8 S249.1
NetD250_1: D250.1 S250.1 | length 448.7
  Component Side w8: D250.1 -6175,1212.8 cw(c-6075,1212.8) -6075,1312.8 S250.1
NetD251_1: D251.1 S251.1 | length 448.7
  Component Side w8: D251.1 -6925,1212.8 cw(c-6825,1212.8) -6825,1312.8 S251.1
NetD252_1: D252.1 S252.1 | length 448.7
  Component Side w8: D252.1 -7675,1212.8 cw(c-7575,1212.8) -7575,1312.8 S252.1
NetD253_1: D253.1 S253.1 | length 448.7
  Component Side w8: D253.1 -8425,1212.8 cw(c-8325,1212.8) -8325,1312.8 S253.1
NetD254_1: D254.1 S254.1 | length 443.7
  Component Side w8: D254.1 -9170,1212.8 cw(c-9070,1212.8) -9070,1312.8 S254.1
NetD255_1: D255.1 S255.1 | length 296.7
  Component Side w8: S255.1 -10585,1212.8 cw(c-10585,1112.8) -10485,1112.8 D255.1
NetD255_2: D255.2 D258.2 D259.2 D261.2 D263.2 D265.2
NetD256_1: D256.1 S256.1 | length 776.6
  Component Side w8: D256.1 -10730,1962.8 cw(c-10630,1962.8) -10630,2062.8 -10491.73,2062.8 -10491.73,2260 ccw(c-10569.72,2260) -10527.09,2325.31 ccw(c-10569.72,2260) -10569.72,2337.99 S256.1@-10616.93,2337.99
NetD257_1: D257.1 S257.2 | length 438.7
  Component Side w8: D257.1 -915,462.8 cw(c-815,462.8) -815,562.8 S257.2@-647.74,562.8
NetD257_2: D257.2 D264.2 D266.2
NetD258_1: D258.1 S258.1 | length 382.8
  Component Side w8: S258.1@-1335,462.8 -1241.25,462.8 -1123.62,462.8 cw(c-1123.62,362.8) -1023.62,362.8 D258.1
NetD259_1: D259.1 S259.1
NetD261_1: D261.1 S261.1
NetD263_1: D263.1 S263.1
NetD264_1: D264.1 S264.2
NetD265_1: D265.1 S265.1
NetD266_1: D266.1 S266.1 | length 342.9
  Component Side w10: S266.1@-10616.47,462.8 -10522.72,462.8 -10445,462.8 cw(c-10445,362.8) -10345,362.8 D266.1
NetD267_1: D267.1 S267.1 | length 1088.6
  Component Side w8: S267.1@-10303.94,1312.8 -10021.14,1312.8 ccw(c-10021.14,1322.8) -10011.2,1321.72 cw(c-9928.94,1312.8) -9846.67,1321.72 cw(c-9928.94,1312.8) -9846.66,1321.66 cw(c-9928.94,1312.8) -9846.41,1306.79 -9846.45,1306.12 ccw(c-9746.67,1312.8) -9746.67,1212.8 -9678.94,1212.8 -9535,1212.8 cw(c-9535,1112.8) -9435,1112.8 D267.1
NetLED401_2: LED401.2 LED402.4
NetLED401_4: LED401.4 U303.4
NetLED402_2: LED402.2 LED403.4
NetLED403_2: LED403.2 LED404.4
NetLED404_2: LED404.2 LED405.4
NetLED405_2: LED405.2 LED406.4
NetLED406_2: LED406.2 LED407.4
NetLED407_2: LED407.2 LED408.4
NetLED408_2: LED408.2 LED409.4
NetLED409_2: LED409.2 LED410.4
NetLED410_2: LED410.2 LED411.4
NetLED411_2: LED411.2 LED412.4
NetLED412_2: LED412.2 LED413.4
NetLED413_2: LED413.2 LED414.4
NetLED414_2: LED414.2 LED415.4
NetLED415_2: LED415.2 LED416.4
NetS201_2: S201.2 S202.2 S215.1 S216.2 S229.2 S230.2 S243.2 S244.2 S257.1 S258.2
NetS203_2: S203.2 S204.2 S217.2 S218.2 S231.2 S232.2 S245.2 S246.2 S259.2 U301.20
NetS205_2: S205.2 S206.2 S219.2 S220.2 S233.2 S234.2 S247.2 S248.2
NetS207_2: S207.2 S208.2 S221.2 S222.2 S235.2 S236.2 S249.2 S250.2 S261.2 U301.21
NetS209_2: S209.2 S210.2 S223.2 S224.2 S237.2 S238.2 S251.2 S252.2 S263.2 U301.22
NetS211_2: S211.2 S212.2 S225.2 S226.2 S239.2 S240.2 S253.2 S254.2 S264.1 S265.2 U301.38
NetS213_2: S213.2 S214.2 S227.2 S228.1 S241.2 S242.2 S255.2 S256.2 S266.2 S267.2 | length 28.9
  Component Side w8: S256.2@-10852.06,2423.13 S256.2@-10851.06,2424.13
  Component Side w10: S255.2 -10957.2,1312.8 ccw(c-10957.2,1315) S255.2@-10955,1315 ; S256.2@-10866.93,2437.99 S256.2@-10852.06,2423.13
NetU301_2: U301.2
NetU301_3: U301.3
NetU301_4: U301.4
NetU301_10: U301.10
NetU301_11: U301.11
NetU301_12: U301.12
NetU301_13: U301.13
NetU301_14: U301.14
NetU301_15: U301.15
NetU301_16: U301.16
NetU301_19: U301.19
NetU301_27: U301.27
NetU301_28: U301.28
NetU301_29: U301.29
NetU301_30: U301.30
NetU301_31: U301.31
NetU301_39: U301.39
NetU301_40: U301.40
NetU301_41: U301.41
NetU301_42: U301.42
NetU301_43: U301.43
NetU301_45: U301.45
NetU301_46: U301.46
NRST: C309.1 U301.7
PA13/SWDIO: CON306.2 U301.34
PA14/SWCLK: CON306.3 U301.37
PB15: U303.2
RAW: CON303.5 D301.5 F301.2
VCC3V3: C301.2 C302.2 C303.2 C304.2 C305.2 C306.2 C311.2 C312.2 CON306.1 R302.1 U301.1 U301.9 U301.24 U301.36 U301.48 U302.2
VCC5V: C310.2 C313.2 F301.1 LED401.1 LED402.1 LED403.1 LED404.1 LED405.1 LED406.1 LED407.1 LED408.1 LED409.1 LED410.1 LED411.1 LED412.1 LED413.1 LED414.1 LED415.1 LED416.1 U302.3 U303.5
pads on no net: CON303.2 D301.1 D301.6 LED416.2 S201. S202. S203. S204. S205. S206. S207. S208. S209. S210. S211. S212. S213. S214. S215. S216. S217. S218. S219. S220. S221. S222. S223. S224. S225. S226. S227. S228. S229. S230. S231. S232. S233. S234. S235. S236. S237. S238. S239. S240. S241. S242. S243. S244. S245. S246. S247. S248. S249. S250. S251. S252. S253. S254. S255. S256. S257. S258. S259. S261. S263. S264. S265. S266. S267.
copper on no net: | length 207.5
  Component Side w8: -10011.26,1230.47 cw(c-10053.94,1273.15) -10053.94,1212.8 -9928.94,1312.8
  other v1: -9930,900

## Polygon pours and split planes (outlines as drawn)
GND on Component Side "Component Side-No Net" (hatched 45Degree grid 50 track 8, remove dead copper, shelved, pour order 1): -25,3700.59 -25,25.59 -11200,25.59 -11200,3700.59
GND on Bottom Layer "Component Side-No Net" (hatched 45Degree grid 50 track 8, remove dead copper, shelved, pour order 0): -25,3700.59 -25,25.59 -11200,25.59 -11200,3700.59

## Other copper
Component Side:
  pour cut-out: -11135.88,26.2 ccw(c-11135.83,87.2) -11135.83,26.2 -10873.59,26.2 cw(c-10736.22,-20.45) -10598.85,26.2 -7456.27,26.2 cw(c-7318.9,-20.45) -7181.53,26.2 -4038.94,26.2 cw(c-3901.58,-20.45) -3760.29,12.49 cw(c-3777.56,8.46) -3759.83,8.46 cw(c-3777.56,8.46) -3794.83,4.44 ccw(c-3901.58,-20.45) -4008.3,4.51 ccw(c-3901.58,-20.45) -4008.32,4.44 -4008.31,4.51 cw(c-4025.59,8.46) -4025.59,-9.27 -7194.88,-9.27 cw(c-7194.88,8.46) -7212.16,4.49 cw(c-7318.9,-20.45) -7212.15,4.44 -7212.16,4.49 ccw(c-7318.9,-20.45) -7425.65,4.44 cw(c-7442.91,8.46) -7442.91,-9.27 -10612.21,-9.27 cw(c-10612.21,8.46) -10629.47,4.44 ccw(c-10736.22,-20.45) -10842.96,4.49 ccw(c-10736.22,-20.45) -10842.97,4.44 -10842.96,4.49 cw(c-10860.24,8.46) -10860.24,-9.27 -11135.83,-9.27 cw(c-11135.83,87.2) -11232.3,87.2 -11232.3,1605 cw(c-11214.57,1605) -11232.3,1605.08 -11232.3,3638.39 cw(c-11135.83,3638.39) -11135.83,3734.86 cw(c-11135.83,3717.13) -11135.77,3734.86 -10860.25,3734.86 cw(c-10860.25,3717.13) -10842.96,3721.1 ccw(c-10736.22,3746.04) -10629.46,3721.15 cw(c-10612.2,3717.12) -10612.2,3734.86 -7442.91,3734.86 cw(c-7442.91,3717.13) -7425.65,3721.15 ccw(c-7318.9,3746.04) -7212.16,3721.1 ccw(c-7318.9,3746.04) -7212.15,3721.15 -7212.16,3721.1 cw(c-7194.88,3717.13) -7194.88,3734.86 -4025.59,3734.86 cw(c-4025.59,3717.13) -4008.31,3721.1 cw(c-3901.58,3746.04) -4008.32,3721.15 -4008.31,3721.1 ccw(c-3901.58,3746.04) -3794.83,3721.15 cw(c-3777.56,3717.13) -3777.56,3734.86 -530.59,3734.86 cw(c-530.59,3717.13) -513.31,3721.1 cw(c-406.58,3746.04) -513.32,3721.15 -513.31,3721.1 ccw(c-406.58,3746.04) -299.83,3721.15 cw(c-282.56,3717.13) -282.03,3734.85 cw(c-281.5,3717.13) -281.5,3734.86 -84.65,3734.86 cw(c-84.65,3638.39) 11.83,3638.39 11.83,1537.99 cw(c-5.91,1537.99) 11.83,1537.87 11.83,87.2 cw(c-84.65,87.2) -84.65,-9.27 -360.24,-9.27 cw(c-360.24,8.46) -377.5,4.44 ccw(c-484.25,-20.45) -591,4.44 cw(c-608.27,8.46) -625.54,12.49 cw(c-484.25,-20.45) -346.88,26.2 -84.65,26.2 ccw(c-84.65,87.2) -23.64,87.2 -23.64,1550 cw(c-5.91,1550) -23.64,1550.12 -23.64,3638.39 ccw(c-84.65,3638.39) -84.65,3699.39 -269.21,3699.39 cw(c-406.58,3746.04) -543.94,3699.39 -3764.21,3699.39 cw(c-3901.58,3746.04) -4038.94,3699.39 -7181.53,3699.39 cw(c-7318.9,3746.04) -7456.27,3699.39 -10598.84,3699.39 cw(c-10736.22,3746.04) -10873.6,3699.39 -11135.83,3699.39 cw(c-11135.83,3717.13) -11135.88,3699.39 cw(c-11135.83,3638.39) -11135.83,3699.39 -11135.88,3699.39 ccw(c-11135.83,3638.39) -11196.84,3638.44 cw(c-11214.57,3638.39) -11196.84,3638.39 -11196.84,1537.99 cw(c-11214.57,1537.99) -11196.84,1537.91 -11196.84,87.2 ccw(c-11135.83,87.2)
  pour cut-out: -3777.56,-9.27 cw(c-3777.56,8.46) -3777.56,26.2 -608.27,26.2 cw(c-608.27,8.46) -590.54,8.46 cw(c-608.27,8.46) -608.27,-9.27
  pour cut-out: -544.75,3714.24 ccw(c-405.52,3746.03) -265.89,3716.07 ccw(c-270.79,3717.13) -265.78,3717.13 ccw(c-270.79,3717.13) -270.79,3722.14 -538.09,3722.14 ccw(c-538.09,3717.13) -542.41,3719.68 ccw(c-539.86,3715.36)
  pour cut-out: -10875.21,3714.24 ccw(c-10735.98,3746.02) -10596.35,3716.07 ccw(c-10601.25,3717.12) -10596.24,3717.12 ccw(c-10601.25,3717.12) -10601.25,3722.14 -10868.56,3722.14 ccw(c-10868.56,3717.12) -10872.87,3719.67 ccw(c-10870.32,3715.36)
  pour cut-out: -7457.88,3714.24 ccw(c-7318.65,3746.02) -7179.02,3716.07 ccw(c-7183.92,3717.12) -7178.91,3717.12 ccw(c-7183.92,3717.12) -7183.92,3722.14 -7451.22,3722.14 ccw(c-7451.22,3717.12) -7455.54,3719.67 ccw(c-7452.99,3715.36)
  pour cut-out: -4040.56,3714.24 ccw(c-3901.33,3746.02) -3761.7,3716.07 ccw(c-3766.6,3717.12) -3761.58,3717.12 ccw(c-3766.6,3717.12) -3766.6,3722.14 -4033.9,3722.14 ccw(c-4033.9,3717.12) -4038.22,3719.67 ccw(c-4035.67,3715.36)
  pour cut-out: -10596.77,11.35 ccw(c-10735.99,-20.43) -10875.63,9.52 ccw(c-10870.72,8.47) -10875.74,8.47 ccw(c-10870.72,8.47) -10870.72,3.45 -10603.42,3.45 ccw(c-10603.42,8.47) -10599.1,5.92 ccw(c-10601.65,10.23)
  pour cut-out: -7179.44,11.35 ccw(c-7318.67,-20.43) -7458.31,9.52 ccw(c-7453.4,8.47) -7458.42,8.47 ccw(c-7453.4,8.47) -7453.4,3.45 -7186.1,3.45 ccw(c-7186.1,8.47) -7181.78,5.92 ccw(c-7184.33,10.23)
  pour cut-out: -344.8,11.35 ccw(c-484.03,-20.43) -623.66,9.52 ccw(c-618.76,8.47) -623.77,8.47 ccw(c-618.76,8.47) -618.76,3.45 -351.45,3.45 ccw(c-351.45,8.47) -347.14,5.92 ccw(c-349.69,10.23)
  pour cut-out: -3762.12,11.35 ccw(c-3901.35,-20.43) -4040.98,9.52 ccw(c-4036.08,8.47) -4041.09,8.47 ccw(c-4036.08,8.47) -4036.08,3.45 -3768.78,3.45 ccw(c-3768.78,8.47) -3764.46,5.92 ccw(c-3767.01,10.23)
  pour cut-out: -544.5,3714.24 ccw(c-405.27,3746.02) -265.63,3716.07 ccw(c-270.54,3717.12) -265.52,3717.12 ccw(c-270.54,3717.12) -270.54,3722.14 -537.84,3722.14 ccw(c-537.84,3717.12) -542.16,3719.67 ccw(c-539.61,3715.36)
Bottom Layer:
  pour cut-out: -11135.88,26.2 ccw(c-11135.83,87.2) -11135.83,26.2 -10873.59,26.2 cw(c-10736.22,-20.45) -10598.85,26.2 -7456.27,26.2 cw(c-7318.9,-20.45) -7181.53,26.2 -4038.94,26.2 cw(c-3901.58,-20.45) -3760.29,12.49 cw(c-3777.56,8.46) -3759.83,8.46 cw(c-3777.56,8.46) -3794.83,4.44 ccw(c-3901.58,-20.45) -4008.3,4.51 ccw(c-3901.58,-20.45) -4008.32,4.44 -4008.31,4.51 cw(c-4025.59,8.46) -4025.59,-9.27 -7194.88,-9.27 cw(c-7194.88,8.46) -7212.16,4.49 cw(c-7318.9,-20.45) -7212.15,4.44 -7212.16,4.49 ccw(c-7318.9,-20.45) -7425.65,4.44 cw(c-7442.91,8.46) -7442.91,-9.27 -10612.21,-9.27 cw(c-10612.21,8.46) -10629.47,4.44 ccw(c-10736.22,-20.45) -10842.96,4.49 ccw(c-10736.22,-20.45) -10842.97,4.44 -10842.96,4.49 cw(c-10860.24,8.46) -10860.24,-9.27 -11135.83,-9.27 cw(c-11135.83,87.2) -11232.3,87.2 -11232.3,1605 cw(c-11214.57,1605) -11232.3,1605.08 -11232.3,3638.39 cw(c-11135.83,3638.39) -11135.83,3734.86 cw(c-11135.83,3717.13) -11135.77,3734.86 -10860.25,3734.86 cw(c-10860.25,3717.13) -10842.96,3721.1 ccw(c-10736.22,3746.04) -10629.46,3721.15 cw(c-10612.2,3717.12) -10612.2,3734.86 -7442.91,3734.86 cw(c-7442.91,3717.13) -7425.65,3721.15 ccw(c-7318.9,3746.04) -7212.16,3721.1 ccw(c-7318.9,3746.04) -7212.15,3721.15 -7212.16,3721.1 cw(c-7194.88,3717.13) -7194.88,3734.86 -4025.59,3734.86 cw(c-4025.59,3717.13) -4008.31,3721.1 cw(c-3901.58,3746.04) -4008.32,3721.15 -4008.31,3721.1 ccw(c-3901.58,3746.04) -3794.83,3721.15 cw(c-3777.56,3717.13) -3777.56,3734.86 -530.59,3734.86 cw(c-530.59,3717.13) -513.31,3721.1 cw(c-406.58,3746.04) -513.32,3721.15 -513.31,3721.1 ccw(c-406.58,3746.04) -299.83,3721.15 cw(c-282.56,3717.13) -282.03,3734.85 cw(c-281.5,3717.13) -281.5,3734.86 -84.65,3734.86 cw(c-84.65,3638.39) 11.83,3638.39 11.83,1537.99 cw(c-5.91,1537.99) 11.83,1537.87 11.83,87.2 cw(c-84.65,87.2) -84.65,-9.27 -360.24,-9.27 cw(c-360.24,8.46) -377.5,4.44 ccw(c-484.25,-20.45) -591,4.44 cw(c-608.27,8.46) -625.54,12.49 cw(c-484.25,-20.45) -346.88,26.2 -84.65,26.2 ccw(c-84.65,87.2) -23.64,87.2 -23.64,1550 cw(c-5.91,1550) -23.64,1550.12 -23.64,3638.39 ccw(c-84.65,3638.39) -84.65,3699.39 -269.21,3699.39 cw(c-406.58,3746.04) -543.94,3699.39 -3764.21,3699.39 cw(c-3901.58,3746.04) -4038.94,3699.39 -7181.53,3699.39 cw(c-7318.9,3746.04) -7456.27,3699.39 -10598.84,3699.39 cw(c-10736.22,3746.04) -10873.6,3699.39 -11135.83,3699.39 cw(c-11135.83,3717.13) -11135.88,3699.39 cw(c-11135.83,3638.39) -11135.83,3699.39 -11135.88,3699.39 ccw(c-11135.83,3638.39) -11196.84,3638.44 cw(c-11214.57,3638.39) -11196.84,3638.39 -11196.84,1537.99 cw(c-11214.57,1537.99) -11196.84,1537.91 -11196.84,87.2 ccw(c-11135.83,87.2)
  pour cut-out: -3777.56,-9.27 cw(c-3777.56,8.46) -3777.56,26.2 -608.27,26.2 cw(c-608.27,8.46) -590.54,8.46 cw(c-608.27,8.46) -608.27,-9.27
  pour cut-out: -344.8,11.35 ccw(c-484.03,-20.43) -623.66,9.52 ccw(c-618.76,8.47) -623.77,8.47 ccw(c-618.76,8.47) -618.76,3.45 -351.45,3.45 ccw(c-351.45,8.47) -347.14,5.92 ccw(c-349.69,10.23)
  pour cut-out: -3762.12,11.35 ccw(c-3901.35,-20.43) -4040.98,9.52 ccw(c-4036.08,8.47) -4041.09,8.47 ccw(c-4036.08,8.47) -4036.08,3.45 -3768.78,3.45 ccw(c-3768.78,8.47) -3764.46,5.92 ccw(c-3767.01,10.23)
  pour cut-out: -7179.44,11.35 ccw(c-7318.67,-20.43) -7458.31,9.52 ccw(c-7453.4,8.47) -7458.42,8.47 ccw(c-7453.4,8.47) -7453.4,3.45 -7186.1,3.45 ccw(c-7186.1,8.47) -7181.78,5.92 ccw(c-7184.33,10.23)
  pour cut-out: -10596.77,11.35 ccw(c-10735.99,-20.43) -10875.63,9.52 ccw(c-10870.72,8.47) -10875.74,8.47 ccw(c-10870.72,8.47) -10870.72,3.45 -10603.42,3.45 ccw(c-10603.42,8.47) -10599.1,5.92 ccw(c-10601.65,10.23)
  pour cut-out: -10875.21,3714.24 ccw(c-10735.98,3746.02) -10596.35,3716.07 ccw(c-10601.25,3717.12) -10596.24,3717.12 ccw(c-10601.25,3717.12) -10601.25,3722.14 -10868.56,3722.14 ccw(c-10868.56,3717.12) -10872.87,3719.67 ccw(c-10870.32,3715.36)
  pour cut-out: -7457.88,3714.24 ccw(c-7318.65,3746.02) -7179.02,3716.07 ccw(c-7183.92,3717.12) -7178.91,3717.12 ccw(c-7183.92,3717.12) -7183.92,3722.14 -7451.22,3722.14 ccw(c-7451.22,3717.12) -7455.54,3719.67 ccw(c-7452.99,3715.36)
  pour cut-out: -4040.56,3714.24 ccw(c-3901.33,3746.02) -3761.7,3716.07 ccw(c-3766.6,3717.12) -3761.58,3717.12 ccw(c-3766.6,3717.12) -3766.6,3722.14 -4033.9,3722.14 ccw(c-4033.9,3717.12) -4038.22,3719.67 ccw(c-4035.67,3715.36)
  pour cut-out: -544.75,3714.24 ccw(c-405.52,3746.03) -265.89,3716.07 ccw(c-270.79,3717.13) -265.78,3717.13 ccw(c-270.79,3717.13) -270.79,3722.14 -538.09,3722.14 ccw(c-538.09,3717.13) -542.41,3719.68 ccw(c-539.86,3715.36)
  pour cut-out: -544.75,3714.24 ccw(c-405.52,3746.03) -265.89,3716.07 ccw(c-270.79,3717.13) -265.78,3717.13 ccw(c-270.79,3717.13) -270.79,3722.14 -538.09,3722.14 ccw(c-538.09,3717.13) -542.41,3719.68 ccw(c-539.86,3715.36)

## Silkscreen, mask and mechanical layers (free items; w line width, h text height)
outline:
  lines w3.94: -11214.57,1537.99 -11214.57,3638.39 cw(c-11135.83,3638.39) -11135.83,3717.13 -10860.25,3717.13 ccw(c-10736.22,3746.04) -10612.2,3717.12 -7442.91,3717.13 ccw(c-7318.9,3746.04) -7194.88,3717.13 -4025.59,3717.13 ccw(c-3901.58,3746.04) -3777.56,3717.13 -927.3,3717.13 ; -11214.57,1605 -11214.57,87.2 ccw(c-11135.83,87.2) -11135.83,8.46 -10860.24,8.46 cw(c-10736.22,-20.45) -10612.21,8.46 -7442.91,8.46 cw(c-7318.9,-20.45) -7194.88,8.46 -4025.59,8.46 cw(c-3901.58,-20.45) -3777.56,8.46 -608.27,8.46 cw(c-484.25,-20.45) -360.24,8.46 -84.65,8.46 ccw(c-84.65,87.2) -5.91,87.2 -5.91,1550 ; -953.06,3717.13 -530.59,3717.13 ccw(c-406.58,3746.04) -282.56,3717.13 ; -281.5,3717.13 -84.65,3717.13 cw(c-84.65,3638.39) -5.91,3638.39 -5.91,1537.99
Mechanical 2:
  drawing of 444 lines, arcs and shapes, not listed
  text "PROPHET" at -801.06,3685.04 h19.68
Mechanical 16:
  drawing of 556 lines, arcs and shapes, not listed

## Text inside footprints (layer, text, board x,y; h text height)
S261: Mechanical 16 "6.25U" at -7431.67,221.06 h60 r270; Mechanical 16 "7U" at -8202,289.96 h60 r270